# Altium PCB PCB1.PcbDoc
Units mm, origin at the board's own origin, x right, y up, seen from the top; angles counter-clockwise.
Board outline 85 x 62.75 mm, 2 copper layers (Top Layer, Bottom Layer); 12 components, 15 nets, 75 pads, 12 vias.
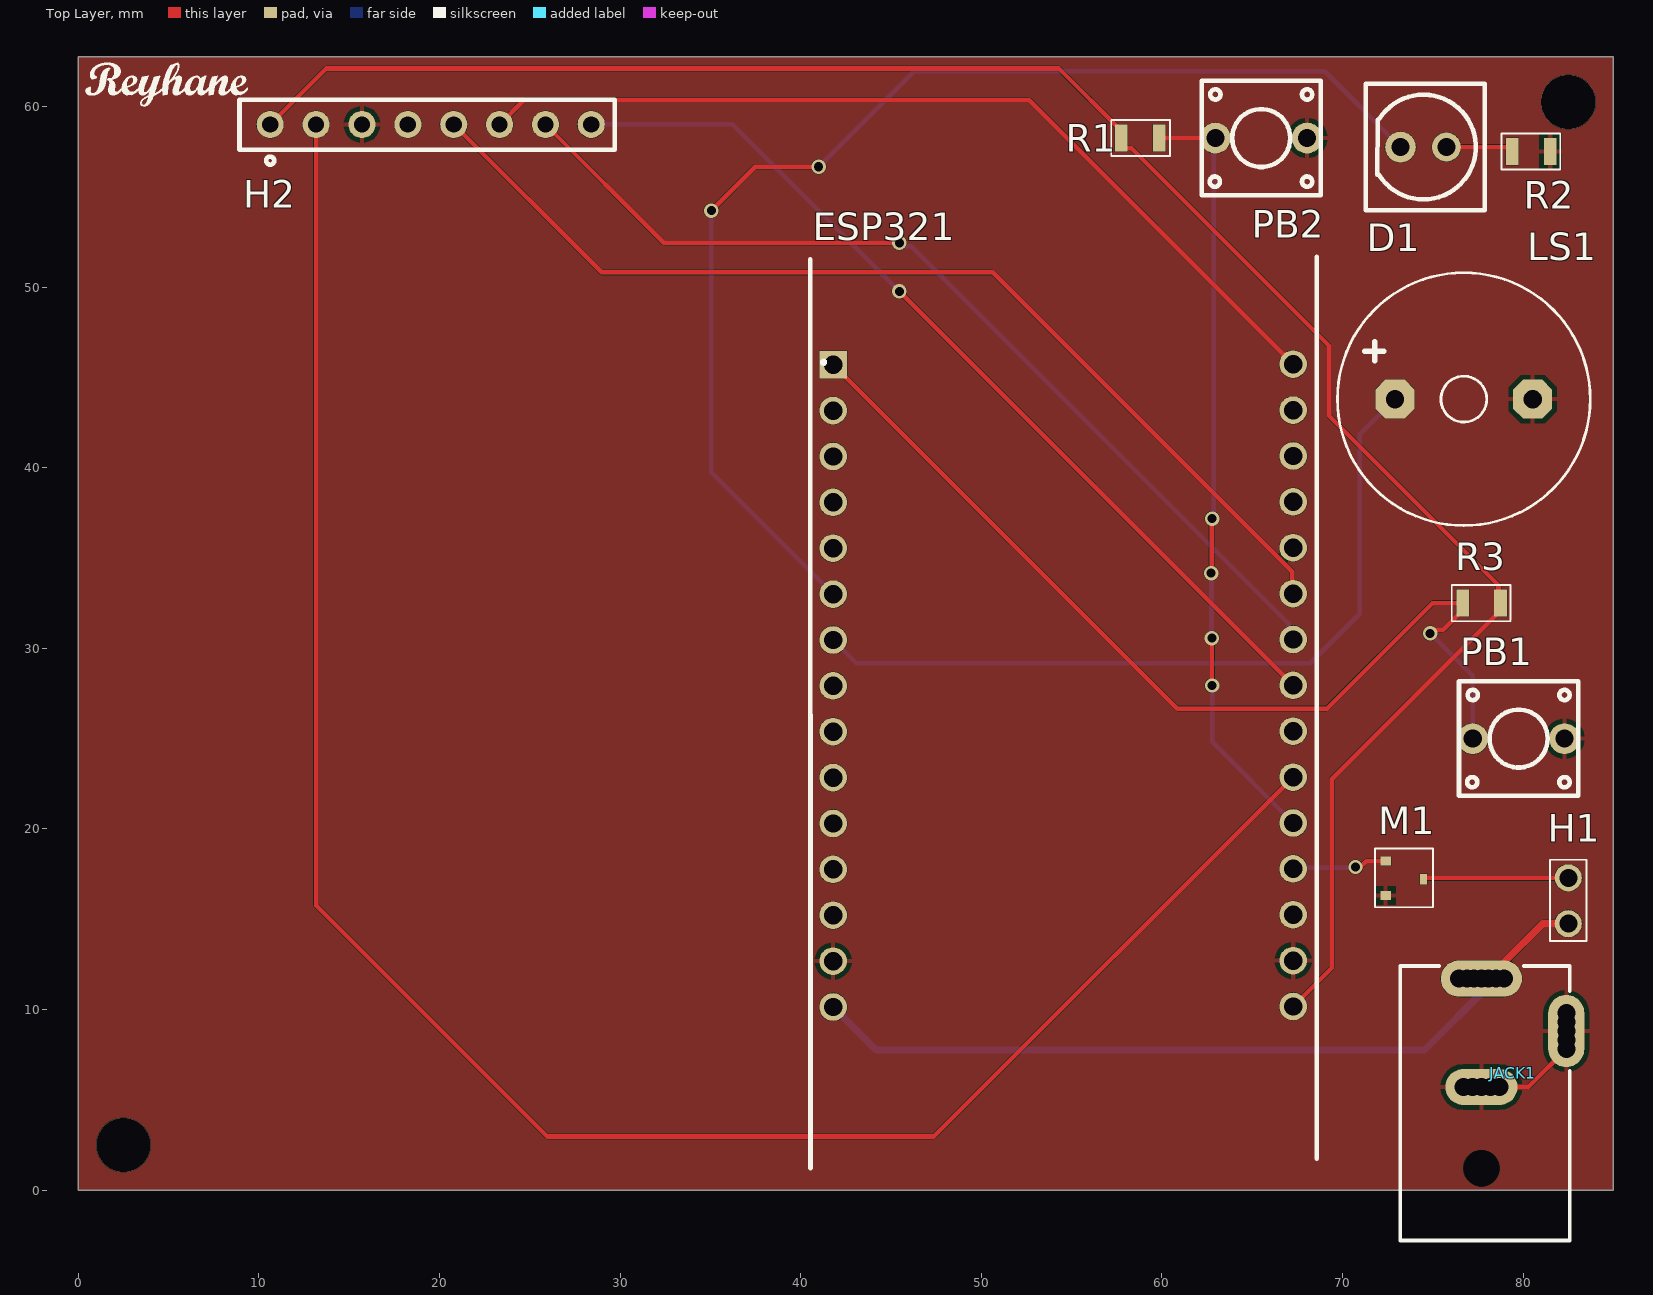
[diagram p0: Top Layer view]
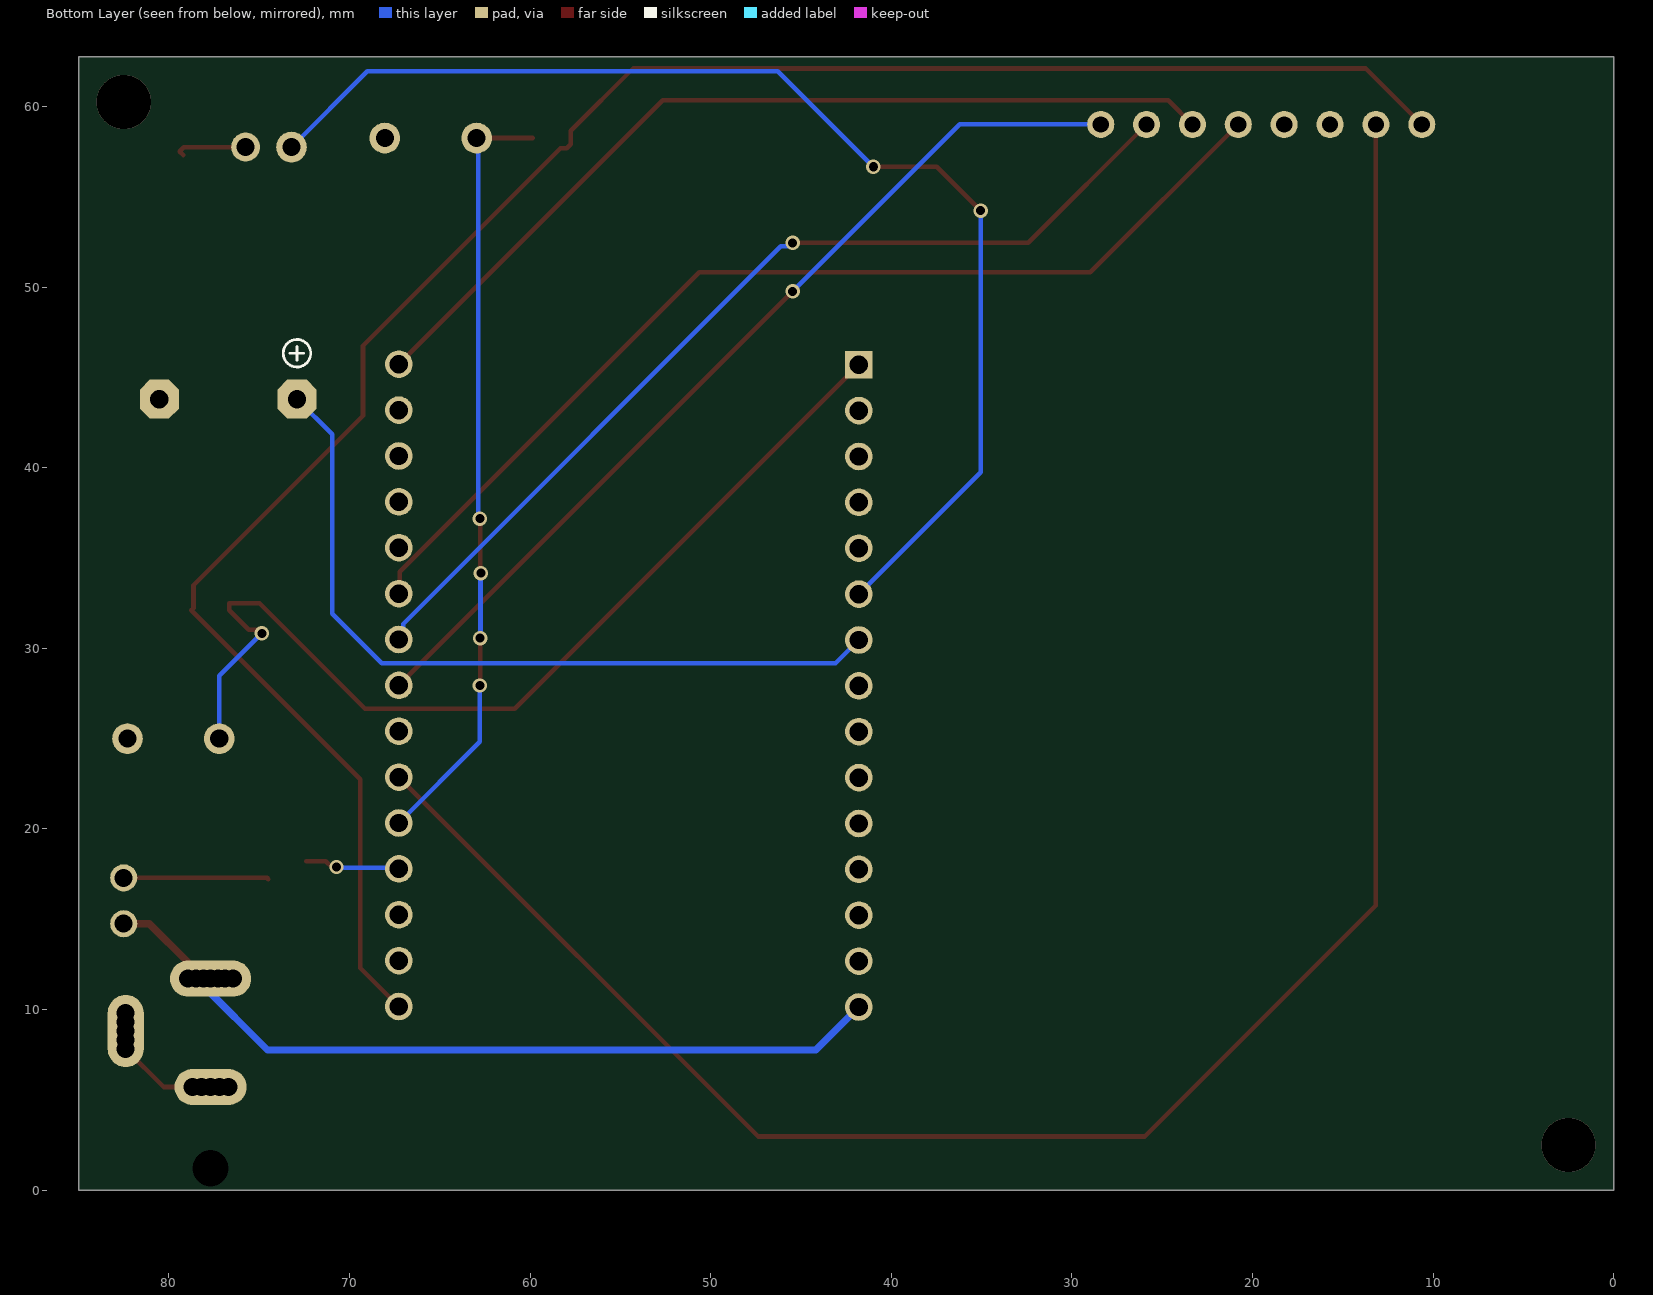
[diagram p1: Bottom Layer view, seen from below]
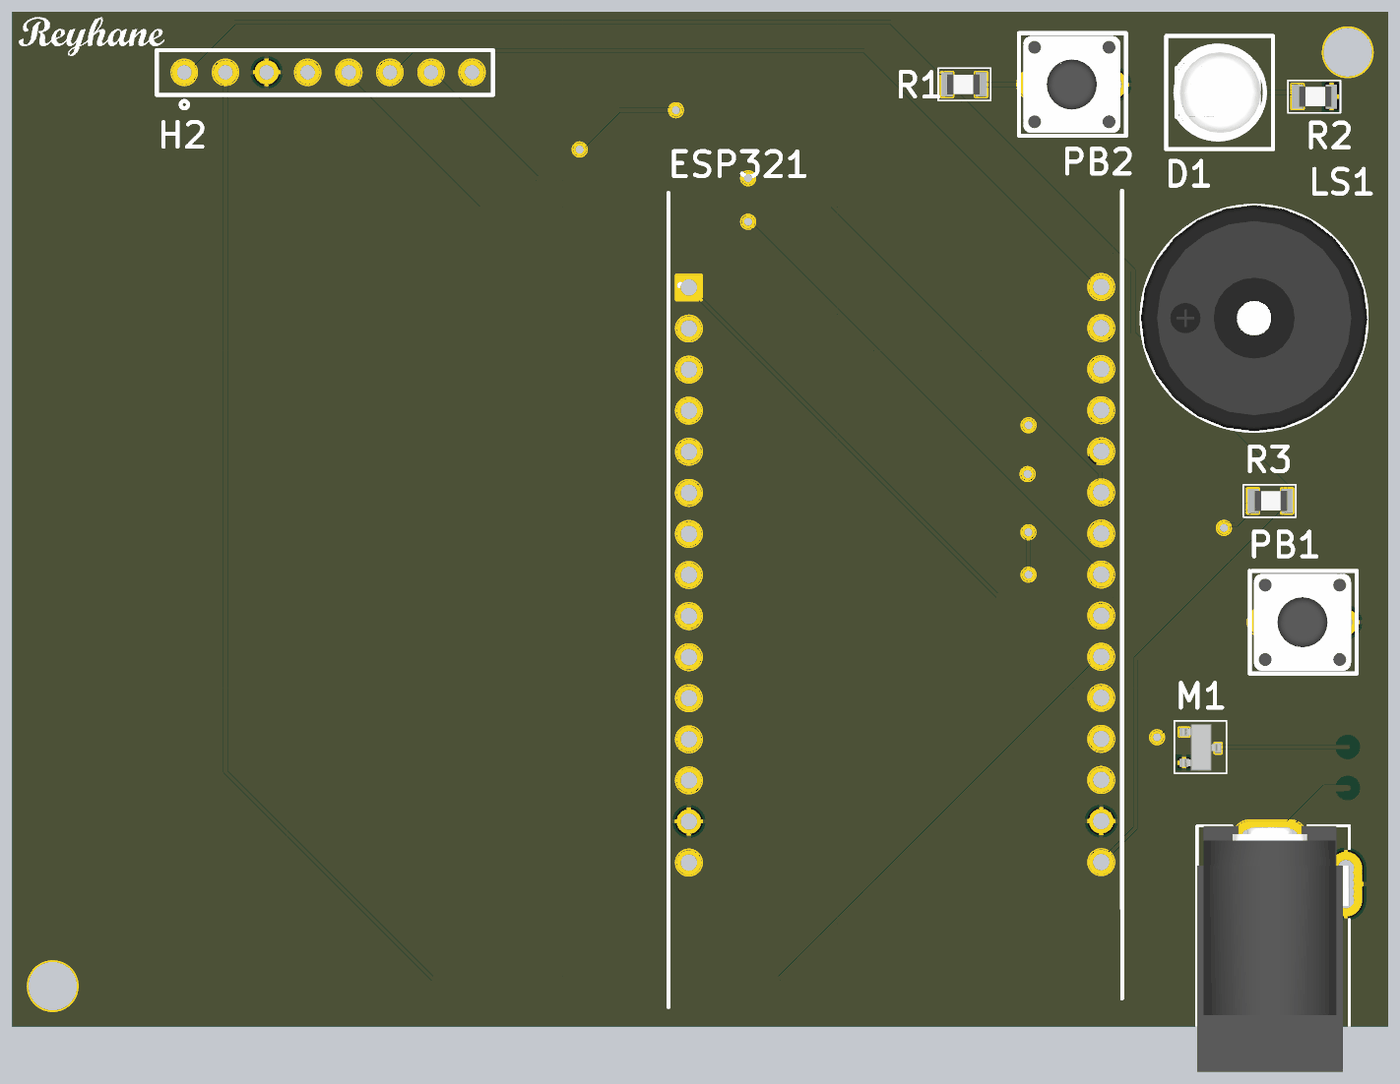
[diagram p2: 3D render of the assembled board from above, using the file's embedded part models]

## Layer stack, top to bottom
Top Solder: solder mask 0.0102, Solder Resist, Dk 3.5
Top Layer: signal copper 0.0356
Dielectric 1: dielectric 0.32, FR-4, Dk 4.8
Bottom Layer: signal copper 0.0356
Bottom Solder: solder mask 0.0102, Solder Resist, Dk 3.5

## Board outline
0,0 85,0 85,62.75 0,62.75

## Design rules (kind name [scope] priority, off if disabled: settings)
Clearance [All] p1: gap=0.01 ignorepadtopadclearanceinfootprint=FALSE
HoleSize [All] p1: absolutevalues=TRUE maxlimit=4 minlimit=0.025 maxpercent=80.000 minpercent=20.000
HoleToHoleClearance [All] p1: gap=0 allowstackedmicrovias=TRUE
PolygonConnect [All] p1: connectstyle=Relief reliefconductorwidth=0.254 reliefentries=4 polygonreliefangle="90 Angle" airgapwidth=0.254
RoutingVias [All] p1: holewidth=0.711 width=1.27 viastyle="Through Hole" minholewidth=0.711 minwidth=1.27 maxholewidth=0.711 maxwidth=1.27
SilkToSolderMaskClearance [IsPad] p1: minsilkscreentomaskgap=0 clearancetoexposedcopper=TRUE
SolderMaskExpansion [All] p1: expansion=0.102 istentingtop=FALSE
Width [All] p1: maxlimit=0.4 minlimit=0.254 preferedwidth=0.254
27 further rules are at their usual default settings.

## Components (designator, comment, footprint, x,y, rotation, side; value= is the part's Value field where it differs from the comment)
D1 "LED" LED 74.38,57.25 r180 top
ESP321 "ESP32" "ESP32 NodeMCU" 54.25,22.75 r0 top
H1 "PinHeader2" "Header x2" -81.1,-70.31 r0 top
H2 "Header 8" "Header 8X1" 19.517,59.002 r90 top
JACK1 "PWR2.5" "Power Jack" 77.69,-2.79 r90 top
LS1 "Buzzer" Buzzer 77,43.5 r0 top
M1 "Mosfet" Mosfet 80.69,16.01 r180 top
PB1 "PUSH BUTTON" "push button" 79.75,25 r0 top
PB2 "PUSH BUTTON" "push button" 65.5,58.25 r0 top
R1 "resistor" Resistor 58.75,58.25 r180 top
R2 "resistor" Resistor 80.5,57.5 r0 top
R3 "resistor" Resistor 77.75,32.5 r0 top

## Footprints (in the part's own frame and the unit in brackets; to place one, negate y for a bottom-side part, rotate by r counter-clockwise, add the part's x,y. Pads: shape width x height; smd on the part's side, far side on the other; paste and mask are expansions set on the pad)
Buzzer [mil]
  oct 85x85 hole 40: 1(-161.1,11.59) 2(138.9,11.59)
  silkscreen extent -287,-264 264,287, body extent -287,-264 265,288, height 289
"ESP32 NodeMCU" [mm]
  round 1.53 hole 1.02: 1(13.02,22.977) 2(13.02,20.437) 3(13.02,17.897) 4(13.02,15.357) 5(13.02,12.817) 6(13.02,10.277) 7(13.02,7.737) 8(13.02,5.197) 9(13.02,2.657) 10(13.02,0.117) 11(13.02,-2.423) 12(13.02,-4.963) 13(13.02,-7.503) 14(13.02,-10.043) 15(13.02,-12.583) 16(-12.45,-12.61) 17(-12.45,-10.07) 18(-12.45,-7.53) 19(-12.45,-4.99) 20(-12.45,-2.45) 21(-12.45,0.09) 22(-12.45,2.63) 23(-12.45,5.17) 24(-12.45,7.71) 25(-12.45,10.25) 26(-12.45,12.79) 27(-12.45,15.33) 28(-12.45,17.87) 29(-12.45,20.41)
  rect 1.53x1.53 hole 1.02: 30(-12.45,22.95)
  silkscreen extent -13.72,-21.54 14.32,28.93
"Header 8X1" [mm]
  round 1.5 hole 0.9: 1(-0.002,8.887) 2(-0.002,6.347) 3(-0.002,3.807) 4(-0.002,1.267) 5(-0.002,-1.273) 6(-0.002,-3.813) 7(-0.002,-6.353) 8(0.002,-8.887)
  silkscreen extent -2.23,-10.18 1.37,10.59
"Header x2" [mm]
  round 1.5 hole 1: 1(163.6,87.6) 2(163.6,85.06)
  silkscreen extent 162.59,84.1 164.61,88.6, body extent 162.3,83.76 164.8,88.84, height 5.38
LED [mm]
  round 1.6 hole 1: 1(-1.37,-0.5)
  round 1.7 hole 1: 2(1.17,-0.5)
  silkscreen extent -3.5,-4 3.1,3, body extent -2.75,-3.4 2.66,2.4, height 7.48
Mosfet [mm]
  rect 0.6x0.5 smd: 1(8.3,-2.2) 3(8.3,-0.3)
  rect 0.4x0.6 smd: 2(6.2,-1.2)
  silkscreen extent 5.68,-2.9 8.9,0.35, body extent 6.1,-2.7 8.4,0.2, height 0.96
"Power Jack" [mm] "Power Adaptor Jack"
  round 1.5 hole 1: 1(14.5,-1.25) 1(14.5,-0.8) 1(14.5,-0.4) 1(14.5,0.4) 1(14.5,0.8) 1(14.5,1.25) 2(8.5,-1) 2(8.5,1) 2(8.5,-0.5) 2(8.5,0.5) 3(10.6,-4.7) 3(11.1,-4.7) 3(12.1,-4.7) 3(12.6,-4.7)
  oval 2x4.5 hole 1: 1(14.5,0)
  oval 2x4 hole 1: 2(8.5,0)
  oval 4x2 hole 1: 3(11.6,-4.7)
  round 1.9 hole 2: MH(4,0)
  silkscreen extent 0,-4.9 15.2,4.5, body extent 0,-4.9 15.2,4.5, height 11
"push button" [mm]
  round 1.7 hole 1: 1(-2.54,0) 2(2.54,0)
  silkscreen extent -3.3,-3.17 3.3,3.17, body extent -3.05,-3 2.95,3, height 4.5
Resistor [mm]
  rect 0.7x1.5 smd: 1(-1.1,0) 2(1,0)
  silkscreen extent -1.7,-1 1.55,1, body extent -1,-0.63 1,0.63, height 0.47

## Part data
ESP321: library part ESP32_DEVKIT
H2: "Header, 8-Pin", LatestRevisionDate=17-Jul-2002, LatestRevisionNote="Re-released for DXP Platform.", Publisher="Altium Limited"
JACK1: "Low Voltage Power Supply Connector", ComponentLink1Description="Manufacturer Link", ComponentLink1URL=http://domino.kycon.com/internet/Products.html, DatasheetDocument=09-May-2002, Published=17-Dec-2003, Publisher="Altium Limited"
LS1: "Magnetic Transducer Buzzer", ComponentLink1Description="Manufacturer Link", ComponentLink1URL=http://www.megastar.com/linecard/buzzmode/index.php, DatasheetDocument=17-Dec-2003, LatestRevisionDate=17-Dec-2003, LatestRevisionNote="Schematic revised, PCB Footprint replaced.", PackageReference=ABSM-1574, Published=24-Mar-1999, Publisher="Altium Limited"
PB1 PB2: "Switch", LatestRevisionDate=17-Jul-2002, LatestRevisionNote="Re-released for DXP Platform.", PackageReference=SPST-2, Published=24-Mar-1999, Publisher="Altium Limited"
R1 R2 R3: library part "Resistor 0805", "VISHAY - CRCW08050000Z0EA - SMD Chip Resistor, Jumper, 0805 [2012 Metric], 0 ohm, CRCW e3 Series, 150 V, Thick Film, 125 mW", Case Code (Imperial)=0805, Case Code (Metric)=2012, Manufacturer=Vishay, Manufacturer Part Number=CRCW08050000Z0EA, Max Operating Temperature=155°C, Max Power Dissipation=125mW, Min Operating Temperature=-55°C, Package Quantity=1, Resistance=0mR, Resistor Type="Thick Film", Supplier Part Number 1=541-0.0ACT-ND, Temperature Coefficient=100ppm/°C, Tolerance=1%, Voltage Rating=150V, Case/Package=0805, Category="Chip SMD Resistors", Contact Plating=Tin,Lead, Depth=1.25mm, Features="Automotive AEC-Q200", Height=0.45mm, Lead Free="Lead Free", Length=2mm, Military Standard=Not, Number of Terminations=2, Packaging="Tape and Reel", Power Rating=125mW, Pricing 1="1=0/10000, 10=0/03600, 25=0/02640, 50=0/02000, 100=0/01480, 250=0/01124, 500=0/00900, 1000=0/00663 (USD)", Radiation Hardening=No, REACH SVHC=Unknown, RoHS=Yes, Stock 1=587199, Supplier 1=Digi-Key, Termination=SMD/SMT, Voltage Rating (DC)=150V, Weight=0.000194oz, Width=1.25mm

## Via types
v1: diameter 0.8, hole 0.5, Top Layer to Bottom Layer, 10 vias
v2: diameter 3, hole 3, Top Layer to Bottom Layer, 2 vias

## Nets (pads, with @x,y where several pads share a name; then routed paths per layer and width w, separated by ;. In a path a pad name is that pad's centre, name@x,y a point inside that pad or via, vN(x,y) a via of type N, cw(c..) or ccw(c..) an arc to the next point about the centre after c; other vN are vias at no path point)
3.3V: ESP321.15 H2.1 R1.2 R3.2 | length 112
  Top Layer w0.254: H2.1 13.73,62.1 54.3,62.1 57.75,58.65 R1.2 57.75,57.908 57.973,57.685 58.315,57.685 69.25,46.75 69.25,42.87 78.638,33.482 78.638,32.212 78.75,32.1 69.4,22.75 69.4,12.297 ESP321.15
9V: ESP321.16 H1.2 JACK1.1 | length 46.5
  Top Layer w0.254: JACK1.1@77.69,11.71 78.09,11.71 78.49,11.71 78.94,11.71 JACK1.1@79.2,11.71 ; H1.2@82.24,14.75 H1.2
  Top Layer w0.35: JACK1.1@78.94,11.71 78.71,11.94 78.71,12.241 78.94,12.471 JACK1.1@78.94,12.61 ; H1.2@82.24,14.75 H1.2
  Top Layer w0.4: JACK1.1@78.94,12.61 81.08,14.75 H1.2@82.24,14.75
  Bottom Layer w0.4: ESP321.16 44.18,7.76 74.54,7.76 78.09,11.31 JACK1.1@78.09,11.71
GND: ESP321.14 ESP321.17 H2.3 JACK1.2 JACK1.3 LS1.2 M1.3 PB1.2 PB2.2 R2.2 | length 6.1
  Top Layer w0.254: JACK1.2@78.19,5.71 80.29,5.71 82.39,7.81 82.39,8.31 JACK1.3@82.39,8.81
NetD1_1: D1.1 R2.1 | length 4
  Top Layer w0.254: D1.1 79.177,57.75 79.4,57.527 R2.1 R2.1@79.21,57.31
NetD1_2: D1.2 ESP321.25 | length 67.1
  Top Layer w0.254: v1(35.05,54.23) 37.48,56.66 v1(41,56.66)
  Bottom Layer w0.254: v1(35.05,54.23) 35.05,39.75 ESP321.25 ; v1(41,56.66) 46.28,61.94 69.02,61.94 D1.2
NetESP321_1: ESP321.1 H2.6 | length 50.5
  Top Layer w0.254: H2.6 24.67,60.34 52.657,60.34 ESP321.1
NetESP321_6: ESP321.6 H2.5 | length 57.9
  Top Layer w0.254: H2.5 28.98,50.81 50.64,50.81 67.216,34.234 67.216,33.081 ESP321.6
NetESP321_7: ESP321.7 H2.7 | length 53.6
  Top Layer w0.254: H2.7 32.42,52.45 v1(45.46,52.45)
  Bottom Layer w0.254: v1(45.46,52.45) 45.654,52.256 46.114,52.256 67.026,31.344 67.026,30.731 ESP321.7
NetESP321_8: ESP321.8 H2.8 | length 51.7
  Top Layer w0.254: v1(45.46,49.757) ESP321.8
  Bottom Layer w0.254: H2.8 36.213,59.004 v1(45.46,49.757)
NetESP321_10: ESP321.10 H2.2 | length 110.9
  Top Layer w0.254: H2.2 13.17,15.76 25.96,2.97 47.373,2.97 ESP321.10
NetESP321_11: ESP321.11 PB2.1 R1.1 | length 43
  Top Layer w0.254: R1.1 PB2.1 ; v1(62.72,34.16) 62.75,34.19 62.75,37.15 v1(62.78,37.18) ; v1(62.77,30.56) 62.77,27.95 v1(62.78,27.94)
  Bottom Layer w0.254: v1(62.72,34.16) 62.745,34.135 62.745,30.585 v1(62.77,30.56) ; v1(62.78,27.94) 62.78,24.817 ESP321.11 ; v1(62.78,37.18) 62.87,37.27 62.87,58.16 PB2.1
NetESP321_12: ESP321.12 M1.1 | length 5.3
  Top Layer w0.254: v1(70.72,17.89) 70.995,17.89 71.315,18.21 M1.1
  Bottom Layer w0.254: ESP321.12 67.321,17.839 70.669,17.839 v1(70.72,17.89)
NetESP321_24: ESP321.24 LS1.1 | length 43.5
  Bottom Layer w0.254: ESP321.24 43.09,29.17 68.22,29.17 70.96,31.91 70.96,41.846 LS1.1
NetESP321_30: ESP321.30 PB1.1 R3.1 | length 54.7
  Top Layer w0.254: ESP321.30 60.84,26.66 69.14,26.66 74.98,32.5 R3.1 76.65,32.1 75.574,31.024 75.044,31.024 v1(74.85,30.83)
  Bottom Layer w0.254: v1(74.85,30.83) 77.21,28.47 PB1.1
NetH1_1: H1.1 M1.2 | length 8
  Top Layer w0.254: M1.2 74.49,17.217 74.563,17.29 H1.1
pads on no net: ESP321.2 ESP321.3 ESP321.4 ESP321.5 ESP321.9 ESP321.13 ESP321.18 ESP321.19 ESP321.20 ESP321.21 ESP321.22 ESP321.23 ESP321.26 ESP321.27 ESP321.28 ESP321.29 H2.4 JACK1.MH
copper on no net:
  other v2: 2.5,2.5 82.5,60.24

## Polygon pours and split planes (outlines as drawn)
GND on Top Layer "GND_L01_P000" (solid, pour order 0): 0.019,62.781 85.019,62.781 85.019,0.031 0.019,0.031

## Silkscreen, mask and mechanical layers (free items; w line width, h text height)
Top Overlay:
  drawing of 2 lines, arcs and shapes, not listed